# Altium PCB EH_board2.PcbDoc
Units mil, origin at the board's own origin, x right, y up, seen from the top; angles counter-clockwise.
Board outline 6000 x 4000 mil, 2 copper layers (Top Layer, Bottom Layer); 12 components, 26 nets, 44 pads, 2 vias.
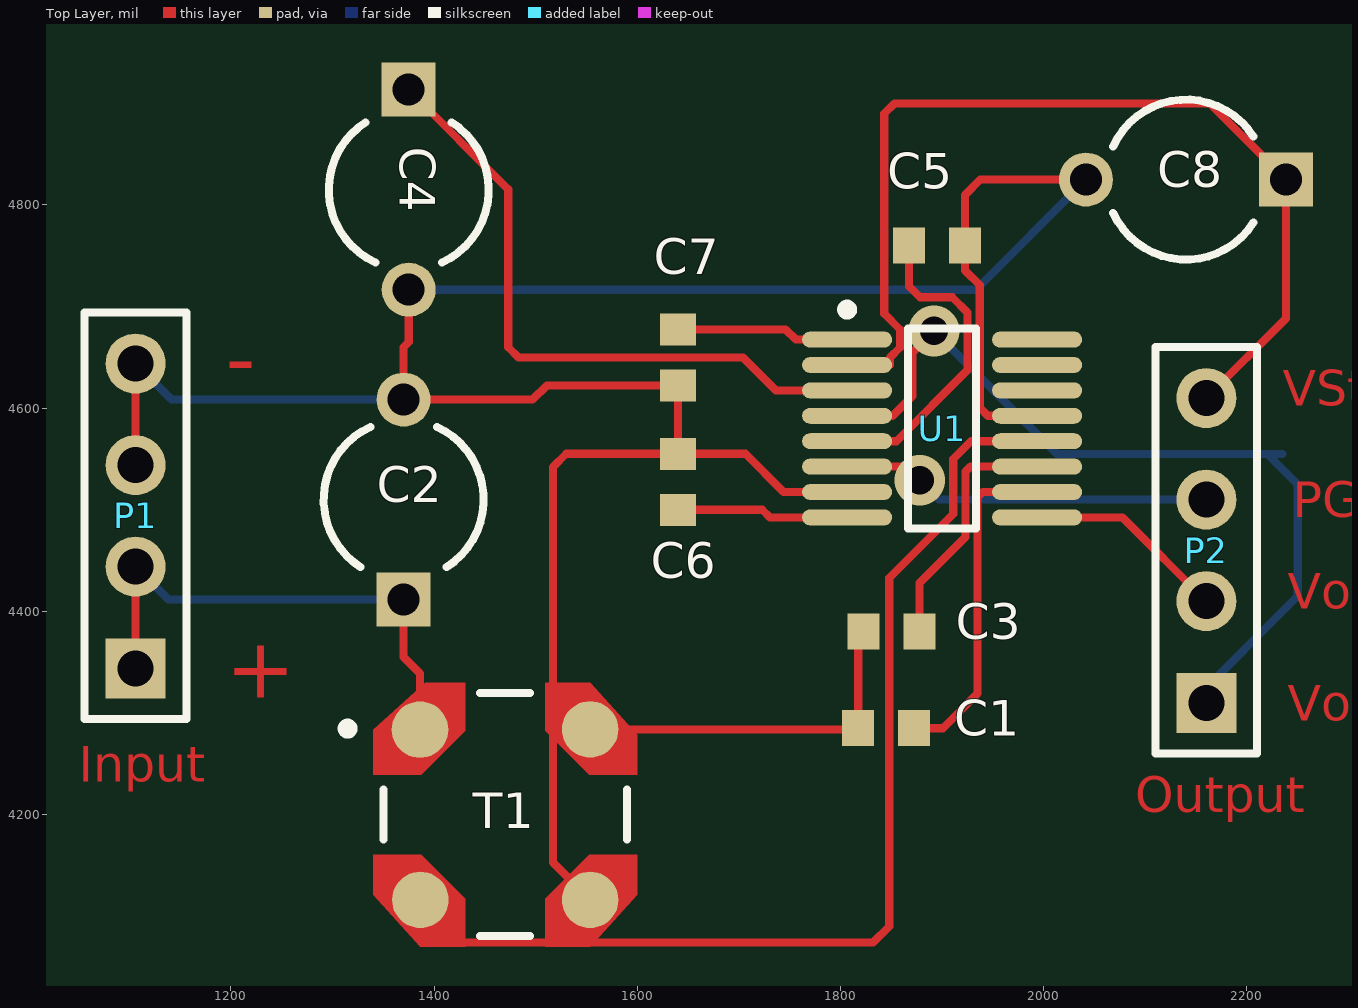
[diagram p0: Top Layer view]
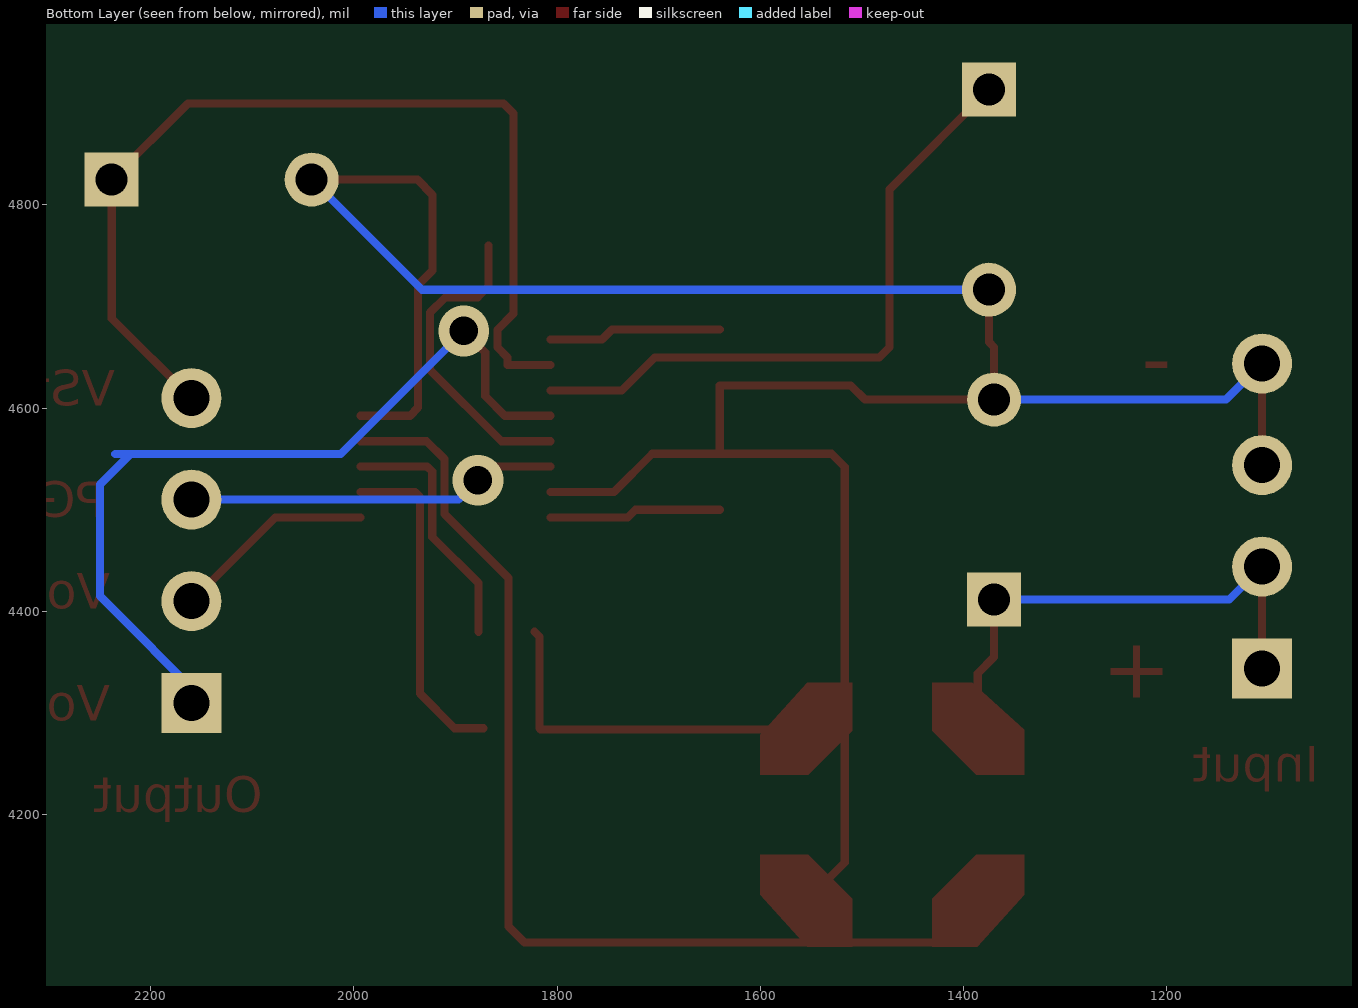
[diagram p1: Bottom Layer view, seen from below]

## Layer stack, top to bottom
Top Solder: solder mask 0.4, Solder Resist, Dk 3.5
Top Layer: signal copper 1.4
Dielectric 1: dielectric 12.6, FR-4, Dk 4.8
Bottom Layer: signal copper 1.4
Bottom Solder: solder mask 0.4, Solder Resist, Dk 3.5

## Board outline
1000,1000 7000,1000 7000,5000 1000,5000

## Design rules (kind name [scope] priority, off if disabled: settings)
Clearance [All] p1: gap=4 ignorepadtopadclearanceinfootprint=FALSE
PolygonConnect [All] p1: connectstyle=Relief reliefconductorwidth=10 reliefentries=4 polygonreliefangle="90 Angle" airgapwidth=10
RoutingVias [All] p1: holewidth=28 width=50 viastyle="Through Hole" minholewidth=28 minwidth=50 maxholewidth=28 maxwidth=50
SolderMaskExpansion [All] p1: expansion=4 istentingtop=FALSE
Width [All] p1: maxlimit=8 minlimit=1 preferedwidth=8
30 further rules are at their usual default settings.

## Classes and differential pairs
component class LTC_Main: C1 C2 C3 C4 C5 C6 C7 C8 P1 P2 U1

## Components (designator, comment, footprint, x,y, rotation, side; value= is the part's Value field where it differs from the comment)
C1 "Cap" 1608[0603] 1845,4285 r0 top value=100pF
C2 "Cap Pol3" CAPR5-4X5 1370,4510 r90 top value=100pF
C3 "Cap" 1608[0603] 1850,4380 r0 top value=100pF
C4 "Cap Pol3" CAPR5-4X5 1375,4815 r270 top value=100pF
C5 "Cap" 1608[0603] 1895,4760 r180 top value=100pF
C6 "Cap" 1608[0603] 1640,4527.56 r270 top value=100pF
C7 "Cap" 1608[0603] 1640,4650 r90 top value=100pF
C8 "Cap Pol3" CAPR5-4X5 2140,4825 r180 top value=100pF
P1 "Header 4" HDR1X4 1106.12,4343.96 r90 top
P2 "Header 4" HDR1X4 2160,4310 r90 top
T1 "LPR6235-253LMLB" FP-LPR6235-MFG 1470,4200 r0 top
U1 "LTC3108EGN-1#PBF" LT-GN-16_N 1900,4580 r0 top

## Footprints (in the part's own frame and the unit in brackets; to place one, negate y for a bottom-side part, rotate by r counter-clockwise, add the part's x,y. Pads: shape width x height; smd on the part's side, far side on the other; paste and mask are expansions set on the pad)
1608[0603] [mm] "Chip Capacitor, Body 1.6x0.8mm, IPC High Density"
  rect 0.8x0.9 smd: 1(-0.7,0) 2(0.7,0)
  body extent -0.87,-0.48 0.87,0.48, height 1.3
CAPR5-4X5 [mm] "Capacitor; 2 Leads"
  rect 1.35x1.35 hole 0.8: 1(-2.5,0)
  round 1.35 hole 0.8: 2(2.5,0)
  silkscreen extent -1.69,-2 1.82,2
FP-LPR6235-MFG [mil]
  round 55.63 smd paste+0 mask+0: 1(-83.91,83.59) 2(-83.59,-83.91) 3(83.59,-83.91) 4(83.59,83.91)
  Top Layer region: -39.37,129.92 -39.37,82.68 -82.68,39.37 -129.92,39.37 -129.92,83.66 -78.74,129.92 -39.37,129.92
  Top Layer region: 129.92,39.37 82.68,39.37 39.37,82.68 39.37,129.92 83.66,129.92 129.92,78.74 129.92,39.37
  Top Layer region: 129.92,-39.37 82.68,-39.37 39.37,-82.68 39.37,-129.92 83.66,-129.92 129.92,-78.74 129.92,-39.37
  Top Layer region: -129.92,-39.37 -82.68,-39.37 -39.37,-82.68 -39.37,-129.92 -83.66,-129.92 -129.92,-78.74 -129.92,-39.37
  silkscreen extent -160,-120 120,120, body extent -134,-134 134,134, height 10
HDR1X4 [mm] "Connector; Header; 4 Position"
  rect 1.5x1.5 hole 0.9: 1(0,0)
  round 1.5 hole 0.9: 2(2.54,0) 3(5.08,0) 4(7.62,0)
  silkscreen extent -1.27,-1.27 8.89,1.27
LT-GN-16_N [mm] "SOP, 16-Leads, Body 5x4mm, Pitch 0.635mm, IPC Medium Density"
  oval 2.25x0.4 smd: 1(-2.375,2.222) 2(-2.375,1.587) 3(-2.375,0.953) 4(-2.375,0.318) 5(-2.375,-0.318) 6(-2.375,-0.953) 7(-2.375,-1.587) 8(-2.375,-2.222) 9(2.375,-2.222) 10(2.375,-1.587) 11(2.375,-0.953) 12(2.375,-0.318) 13(2.375,0.318) 14(2.375,0.953) 15(2.375,1.587) 16(2.375,2.222)
  silkscreen extent -2.5,-2.5 0.85,3.1, body extent -2,-2.5 2,2.5, height 1.75

## Part data
C1 C3 C5 C6 C7: "Capacitor", LatestRevisionDate=17-Jul-2002, LatestRevisionNote="Re-released for DXP Platform.", PackageDescription="Radial Cap, Thru-Hole; 2 Leads; 0.3 in Pin Spacing", PackageReference=RAD-0.3, Published=8-Jun-2000, Publisher="Altium Limited"
C2 C4 C8: "Polarized Capacitor (Surface Mount)", LatestRevisionDate=29-May-2009, LatestRevisionNote="IPC-7351 Footprint Added.", PackageDescription="Chip Capacitor", PackageReference=C0805, Published=8-Jun-2000, Publisher="Altium Limited"
P1 P2: "Header, 4-Pin", LatestRevisionDate=17-Jul-2002, LatestRevisionNote="Re-released for DXP Platform.", Publisher="Altium Limited"
T1: library part CMP-11284-000017-1, "Coupled Inductors Mini Step-up Xfmr SEE PART COMMENT TAB", Ambient Temperature Range High=+85°C, Ambient Temperature Range Low=-40°C, Frequency=100kHz, Inductance Primary=25uH, Isolation Voltage=300Vrms, Manufacturer=Coilcraft, Package=LPR6235, Primary Resistance=0.74Ω, Sec Resistance=13.7Ω, Automotive=No, Category=Trans, ComponentLink2Description=Datasheet, ComponentLink2URL=https://www.coilcraft.com/pdfs/lpr6235.pdf, Device Class L1="Passive Components", Device Class L2=Transformers, Device Class L3=unset, Height=3.5mm, Lead Free=Yes, Manufacturer Part Number=LPR6235-253LMLB, Mouser Description="Coupled Inductors Mini Step-up Xfmr SEE PART COMMENT TAB", Octopart=https://octopart.com/lpr6235-253lmlb-coilcraft-14935593, RoHS=TRUE, Turns Ratio=1:10
U1: library part CMP-0473-00092-1, "Ultralow Voltage Step-Up Converter and Power Manager, 16-pin SOP (GN-16), -40 to 125 degC, Pb-Free", Manufacturer="Linear Technology", ComponentLink1Description="Manufacturer URL", ComponentLink1URL=http://www.linear.com/, ComponentLink2Description=Datasheet, ComponentLink2URL=http://cds.linear.com/docs/en/datasheet/31081fa.pdf, ComponentLink3Description="Package Specification", ComponentLink3URL=http://cds.linear.com/docs/en/packaging/05081641_B_GN16.pdf, DatasheetVersion="Rev. A", Energy Source=Thermoelectric, Mounting Technology="Surface Mount", Number of Outputs=3, PackageDescription="16-Pin Plastic SSOP, Body 4.9 x 3.9 mm, Pitch 0.635 mm", PackageReference=GN-16, PackageVersion="Rev. B, 03/2012", PartNumber=LTC3108EGN-1#PBF, RoHS=TRUE, Topology="Boost, LDO", Vin Max(V)=0.5, Vin Min(V)=0.02, Vout Max(V)=5

## Via types
v1: diameter 50, hole 28, Top Layer to Bottom Layer, 2 vias

## Nets (pads, with @x,y where several pads share a name; then routed paths per layer and width w, separated by ;. In a path a pad name is that pad's centre, name@x,y a point inside that pad or via, vN(x,y) a via of type N, cw(c..) or ccw(c..) an arc to the next point about the centre after c; other vN are vias at no path point)
GND: C2.2 C4.2 C5.1 C6.1 C7.1 C8.2 P1.3 P1.4 T1.3 U1.7 U1.13 | length 2695.6
  Top Layer w8: P1.3 P1.4 ; C4.2 1375,4665 1370,4660 C2.2 1497,4608.43 1511.02,4622.44 C7.1 C6.1 ; T1.3 1517,4152.68 1517,4542.12 1530,4555.12 C6.1 ; U1.7 1744,4517.5 1706.38,4555.12 C6.1 ; U1.13 1945,4592.5 1937,4600.5 1937,4721.22 1922.56,4735.66 C5.1 1922.56,4810 1937.56,4825 C8.2
  Bottom Layer w8: P1.4 1141.66,4608.43 C2.2 ; C4.2 1933.15,4716.57 C8.2
NetBT1_1: 
NetC1_1: C1.1 C3.1 T1.4 | length 361.4
  Top Layer w8: T1.4 1816.35,4283.91 C1.1 1817.44,4375 C3.1
NetC1_2: C1.2 U1.10 | length 330.6
  Top Layer w8: C1.2 1901,4285 1935,4319 1935,4512.5 1940,4517.5 U1.10
NetC2_1: C2.1 P1.1 P1.2 T1.1 | length 511.9
  Top Layer w8: P1.1 P1.2 ; C2.1 1370,4355.09 1386.09,4339 T1.1
  Bottom Layer w8: P1.2 1138.51,4411.57 C2.1
NetC3_2: C3.2 U1.11 | length 248.9
  Top Layer w8: C3.2 1877.56,4427.95 1923,4473.39 1923,4537.5 1928,4542.5 U1.11
NetC4_1: C4.1 U1.3 | length 645.1
  Top Layer w8: C4.1 1473,4815.43 1473,4660 1483,4650 1704,4650 1736.5,4617.5 U1.3
NetC5_2: C5.2 U1.5 | length 312.4
  Top Layer w8: U1.5 1854.94,4567.5 1925,4637.56 1925,4694.22 1910,4709.22 1878.22,4709.22 1867.44,4720 C5.2
NetC6_2: C6.2 U1.8 | length 169.6
  Top Layer w8: C6.2 1723,4500 1730.5,4492.5 U1.8
NetC7_2: C7.2 U1.1 | length 170.7
  Top Layer w8: C7.2 1745.98,4677.56 1756.04,4667.5 U1.1
NetC8_1: C8.1 P2.4 U1.2 | length 978.6
  Top Layer w8: U1.2 1848.79,4642.5 1848.79,4650 1858.79,4660 1858.79,4677.21 1843,4693 1843,4890 1853,4900 2163.43,4900 C8.1 2238.43,4688.43 P2.4
NetC9_2: 
NetC10_2: 
NetCFLTR1_1: 
NetL1_2: 
NetP2_1: P2.1 U1.4 | length 839.2
  Top Layer w8: U1.4 1851.29,4592.5 1870.79,4612 1870.79,4654.79 v1(1892,4676)
  Bottom Layer w8: v1(1892,4676) 2013,4555 2235,4555 ; P2.1@2145,4310 2250,4415 2250,4525 2220,4555
NetP2_2: P2.2 U1.9 | length 200.7
  Top Layer w8: U1.9 2077.5,4492.5 P2.2
NetP2_3: P2.3 U1.6 | length 367
  Top Layer w8: U1.6 1864.5,4542.5 v1(1878,4529)
  Bottom Layer w8: v1(1878,4529) 1897,4510 P2.3
NetP4_1: 
NetR1_2: 
NetROK1_1: 
NetROK2_1: 
NetROK3_1: 
NetROV1_2: 
NetRUV1_2: 
NetT1_2: T1.2 U1.12 | length 1061.5
  Top Layer w8: T1.2 1428.5,4074 1832,4074 1848,4090 1848,4433 1911,4496 1911,4550 1928.5,4567.5 U1.12
pads on no net: U1.14 U1.15 U1.16

## Other copper
Top Layer:
  text "-" at 1195,4620.01 h60
  text "VStore" at 2235.04,4590.62 h60
  text "PGD" at 2245,4480.62 h60
  text "Vout2En" at 2240.04,4390.62 h60
  text "+" at 1195,4315 h60
  text "Vout2" at 2240.04,4280.62 h60
  text "Input" at 1050,4220.65 h60
  text "Output" at 2090,4190.65 h60